# Altium PCB PCB2.PcbDoc
Units mil, origin at the board's own origin, x right, y up, seen from the top; angles counter-clockwise.
Board outline 6000 x 4000 mil, 2 copper layers (Top Layer, Bottom Layer); 29 components, 20 nets, 86 pads, 13 vias.
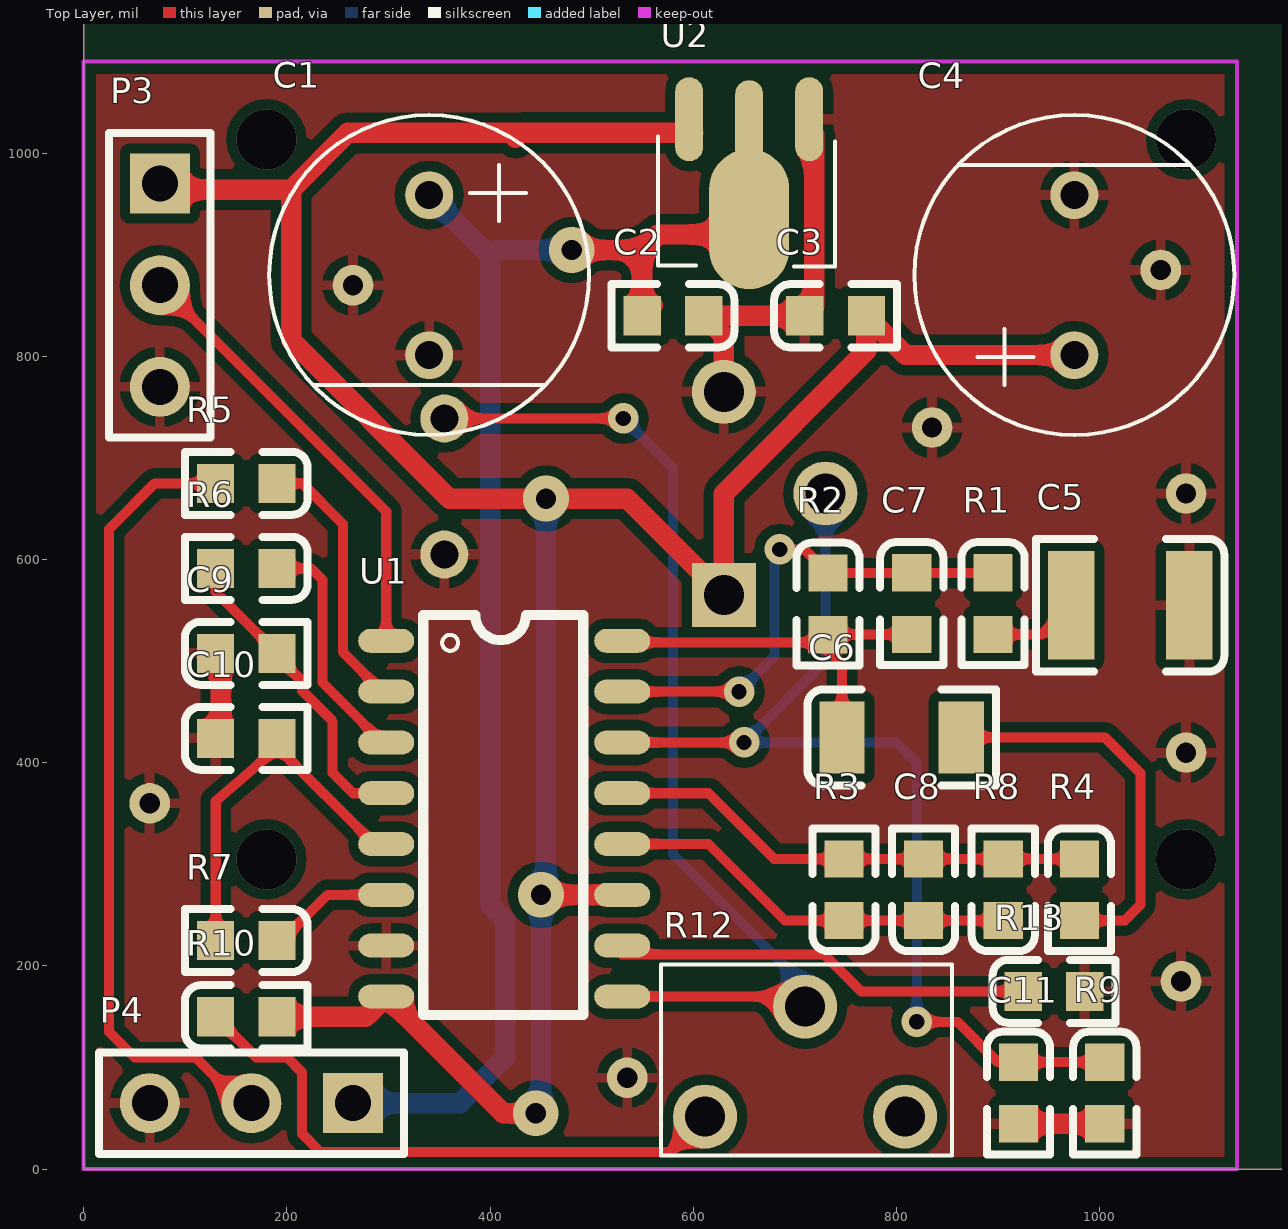
[diagram p0: Top Layer view]
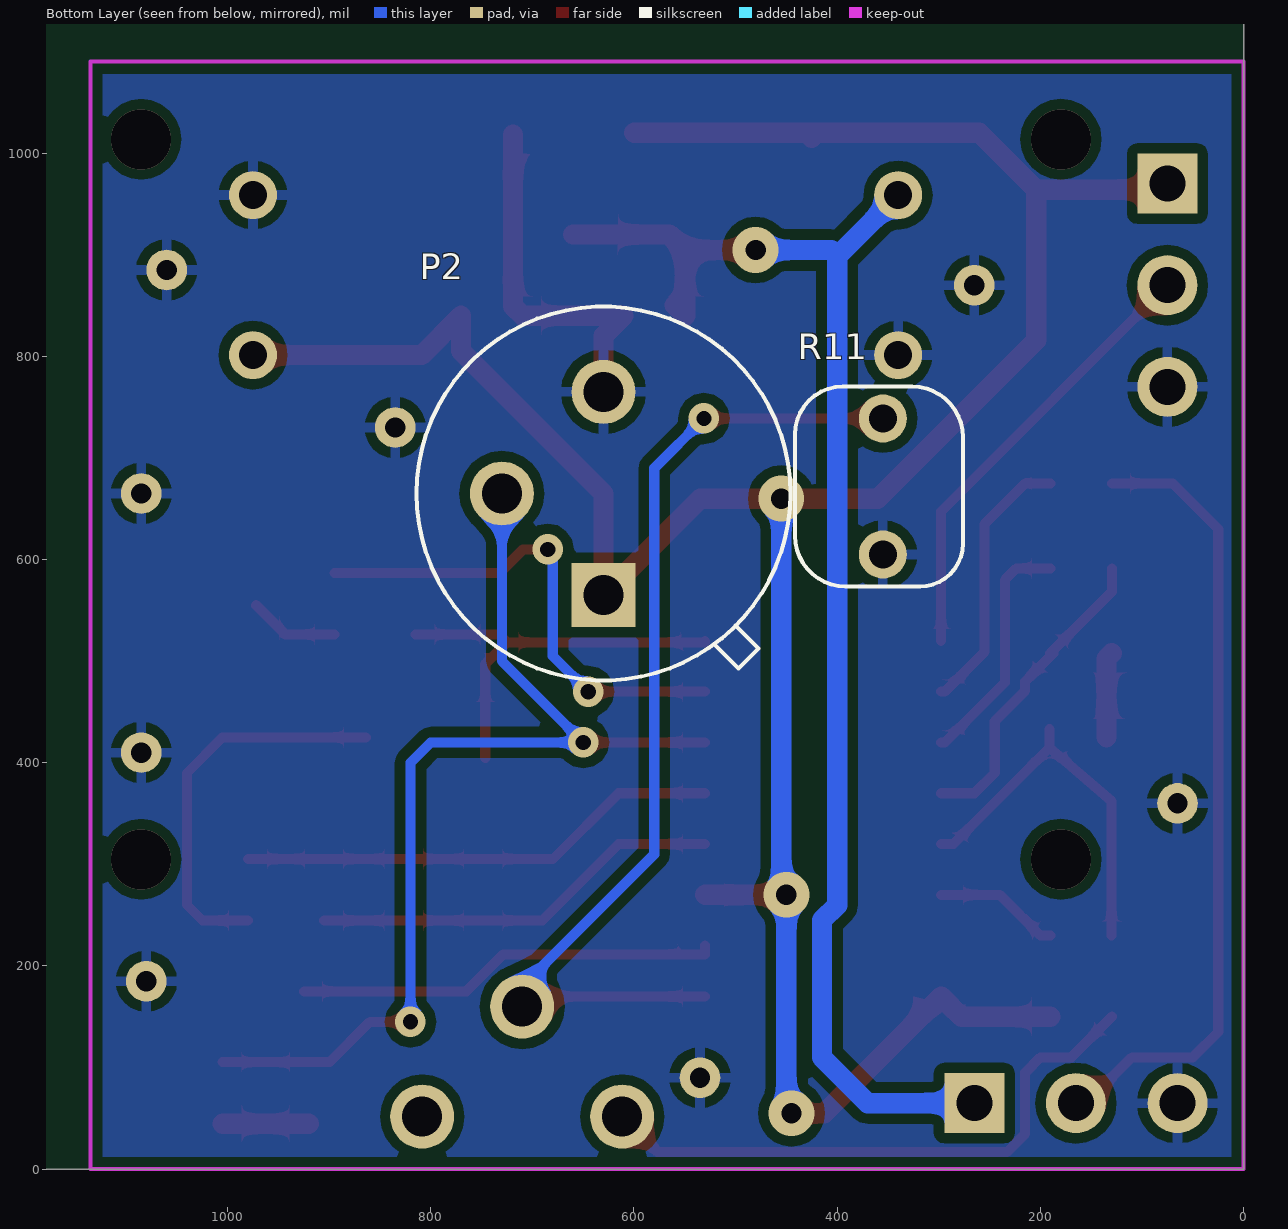
[diagram p1: Bottom Layer view, seen from below]
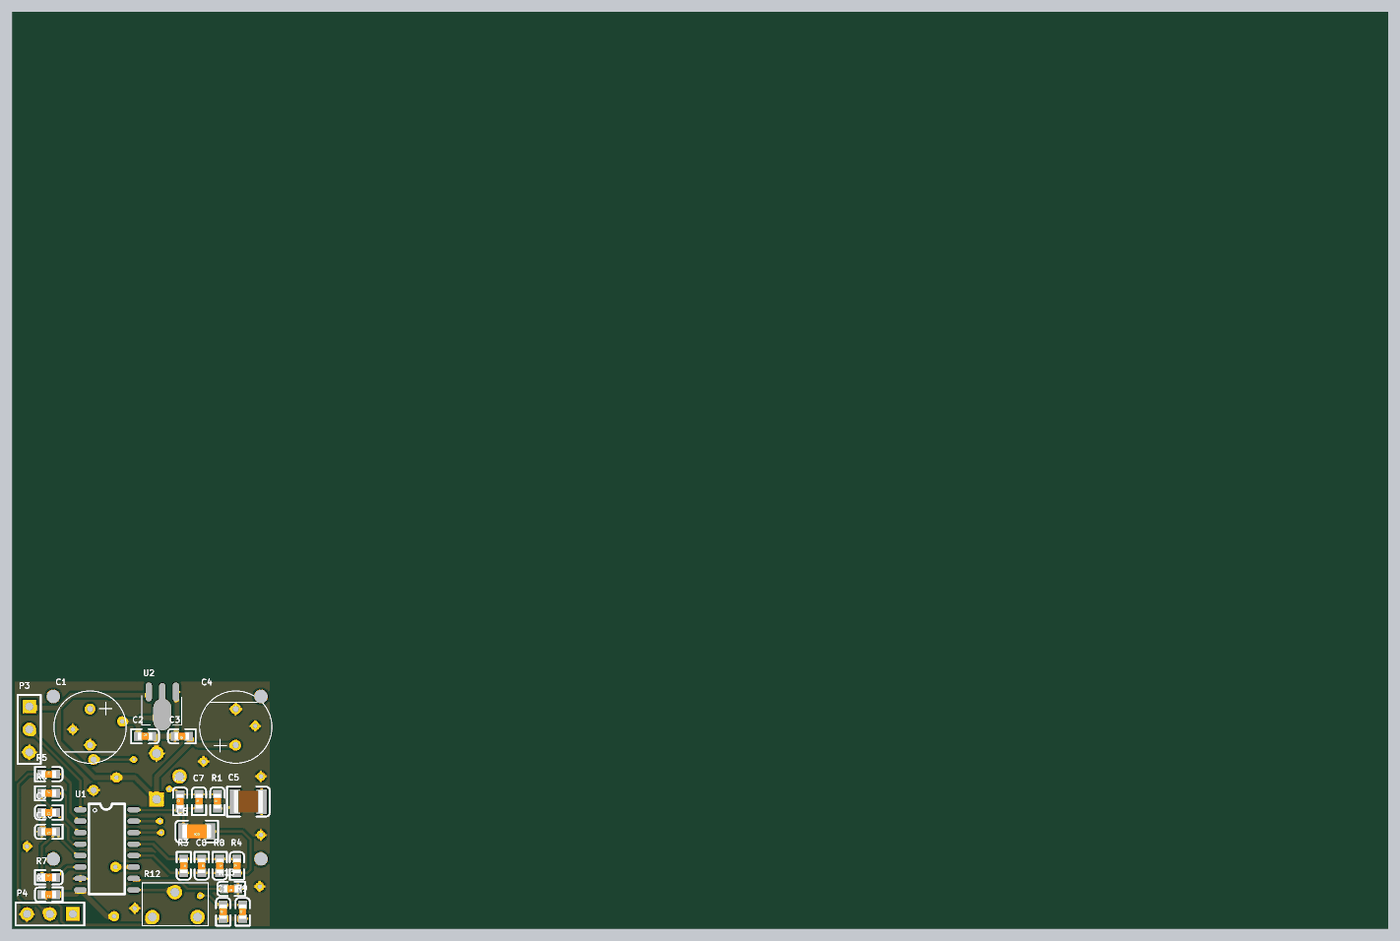
[diagram p2: 3D render of the assembled board from above, using the file's embedded part models]

## Layer stack, top to bottom
Top Solder: solder mask 0.4, Solder Resist, Dk 3.5
Top Layer: signal copper 1.4
Dielectric 1: dielectric 12.6, FR-4, Dk 4.8
Bottom Layer: signal copper 1.4
Bottom Solder: solder mask 0.4, Solder Resist, Dk 3.5

## Board outline
0,0 6000,0 6000,4000 0,4000

## Design rules (kind name [scope] priority, off if disabled: settings)
Clearance [All] p1: gap=10 ignorepadtopadclearanceinfootprint=FALSE except(0: Arc-Hole Track-Hole SMDPad-Hole THPad-Hole Via-Hole Fill-Hole Poly-Hole Region-Hole Text-Hole)
PolygonConnect [All] p1: connectstyle=Relief reliefconductorwidth=10 reliefentries=4 polygonreliefangle="90 Angle" airgapwidth=10
RoutingVias RoutingVias_1 [InNetClass('power')] p1: holewidth=20 width=45 viastyle="Through Hole" minholewidth=20 minwidth=45 maxholewidth=20 maxwidth=45
RoutingVias [All] p2: holewidth=15 width=30 viastyle="Through Hole" minholewidth=15 minwidth=30 maxholewidth=15 maxwidth=30
SolderMaskExpansion [All] p1: expansion=4
Width Width_1 [InNetClass('power')] p1: maxlimit=40 minlimit=20 preferedwidth=40
Width [All] p2: maxlimit=10 minlimit=10 preferedwidth=10
30 further rules are at their usual default settings.

## Classes and differential pairs
net class power: 3.3V 5V GND

## Components (designator, comment, footprint, x,y, rotation, side; value= is the part's Value field where it differs from the comment)
C1 "Cap" 8*12 340,880 r270 top value=220uF
C2 "Cap" 0603 580,840 r0 top value=0.1uF
C3 "Cap" 0603 740,840 r180 top value=0.1uF
C4 "Cap" 8*12 975,880 r90 top value=220uF
C5 "Cap Pol1" 1210 1030,555 r0 top value=47uF
C6 "Cap Pol1" 1206 805,425 r180 top value=10uF
C7 "Cap" 0603 815,556.65 r90 top value=0.01uF
C8 "Cap" 0603 826.67,275 r270 top value=0.01uF
C9 "Cap" 0603 160,507.67 r180 top value=0.1uF
C10 "Cap" 0603 160,424 r180 top value=0.1uF
C11 "Cap" 0603 920,75 r90 top value=0.01uF
P2 "RE200B" RE200B 630,665 r270 bottom locked
P3 "Header 3" HDR1X3 75,970 r270 top
P4 "Header 3" HDR1X3 265,65 r180 top
R1 "Res2" 0603 895,556.65 r90 top value=4.7K
R2 "Res2" 0603 732.5,556.34 r90 top value=2M
R3 "Res2" 0603 748.33,275 r270 top value=1M
R4 "Res2" 0603 980,275 r90 top value=10K
R5 "Res2" 0603 160,675 r0 top value=4.7K
R6 "Res2" 0603 160,591.33 r0 top value=200K
R7 "Res2" 0603 160,225 r0 top value=4.7M
R8 "Res2" 0603 905,275 r270 top value=10K
R9 "Res2" 0603 1005,75 r90 top value=47K
R10 "Res2" 0603 160,150 r180 top value=10k
R11 "Res2" photoresistor5539 355,671.93 r90 bottom value=1M
R12 "AdjustRes" RM063-503 611.57,51.73 r0 top
R13 "Res2" 0603 955,175 r180 top value=1M
U1 "BISS0001" BISS0001 334.13,151.89 r0 top locked
U2 "LDO" SOT-89-3 655,1030 r180 top

## Footprints (in the part's own frame and the unit in brackets; to place one, negate y for a bottom-side part, rotate by r counter-clockwise, add the part's x,y. Pads: shape width x height; smd on the part's side, far side on the other; paste and mask are expansions set on the pad)
8*12 [mm]
  round 1.2 hole 0.7: 1(-2,0) 2(2,0)
  silkscreen extent -4,-4 4,4
0603 [mm]
  rect 0.93x0.98 smd: 1(-0.77,0) 2(0.77,0)
  silkscreen extent -1.53,-0.79 1.54,0.79, body extent -0.8,-0.4 0.8,0.4, height 0.3
1206 [mm]
  rect 1.13x1.8 smd: 1(-1.49,0) 2(1.49,0)
  silkscreen extent -2.36,-1.2 2.35,1.2, body extent -1.6,-0.81 1.6,0.79, height 1
1210 [mm]
  rect 1.16x2.72 smd: 1(-1.475,0) 2(1.475,0)
  silkscreen extent -2.36,-1.66 2.35,1.66, body extent -1.6,-1.25 1.6,1.25, height 1.3
BISS0001 [mm]
  oval 1.4x0.6 smd: 1(-0.925,9.35) 2(-0.925,8.08) 3(-0.925,6.81) 4(-0.925,5.54) 5(-0.925,4.27) 6(-0.925,3) 7(-0.925,1.73) 8(-0.925,0.46) 9(4.975,0.46) 10(4.975,1.73) 11(4.975,3) 12(4.975,4.27) 13(4.975,5.54) 14(4.975,6.81) 15(4.975,8.08) 16(4.975,9.35)
  silkscreen extent 0,0 4,10
HDR1X3 [mm] "Connector; Header; 3 Position"
  rect 1.5x1.5 hole 0.9: 1(0,0)
  round 1.5 hole 0.9: 2(2.54,0) 3(5.08,0)
  silkscreen extent -1.27,-1.27 6.35,1.27
photoresistor5539 [mm]
  round 1.2 hole 0.7: 1(-1.7,0) 2(1.7,0)
  silkscreen extent -2.5,-2 2.5,2.2
RE200B [mm]
  rect 1.6x1.6 hole 1: 1(2.54,0)
  round 1.6 hole 1: 2(0,-2.54) 3(-2.54,0)
  silkscreen extent -4.67,-4.67 4.67,4.67
RM063-503 [mm]
  round 1.6 hole 1: 1(0,0) 2(2.5,2.75) 3(5,0)
  silkscreen extent -1.1,-0.97 6.17,3.8
SOT-89-3 [mm]
  oval 0.7x2.1 smd: 1(-1.501,-0.086) 2(0,-0.013) 3(1.501,-0.086)
  oval 2x3.5 smd: 2(0,2.413)
  silkscreen extent -2.15,0.35 2.27,3.6

## Part data
C1 C2 C3 C4 C7 C8 C9 C10 C11: "Capacitor", LatestRevisionDate=17-Jul-2002, LatestRevisionNote="Re-released for DXP Platform.", PackageDescription="Radial Cap, Thru-Hole; 2 Leads; 0.3 in Pin Spacing", PackageReference=RAD-0.3, Published=8-Jun-2000, Publisher="Altium Limited"
C5 C6: "Polarized Capacitor (Radial)", LatestRevisionDate=17-Jul-2002, LatestRevisionNote="Re-released for DXP Platform.", PackageDescription="Polarized Capacitor (Radial); 2 Leads", PackageReference=RB7.6-15, Published=8-Jun-2000, Publisher="Altium Limited"
P2 U1: "Infrared Sensor"
P3 P4: "Header, 3-Pin", LatestRevisionDate=17-Jul-2002, LatestRevisionNote="Re-released for DXP Platform.", Publisher="Altium Limited"
R1 R2 R3 R4 R5 R6 R7 R8 R9 R10 R11 R13: "Resistor", LatestRevisionDate=17-Jul-2002, LatestRevisionNote="Re-released for DXP Platform.", PackageDescription="Axial Device, Thru-Hole; 2 Leads; 0.4 in Pin Spacing", PackageReference=AXIAL-0.4, Published=8-Jun-2000, Publisher="Altium Limited"
R12: library part RM063-503, "RM063-503", =50k
U2: library part SE8550, "+1V~35V >5V"

## Free pads (board coordinates)
  round 40 hole 20: 2(535,90) 3(65,360) 4(835,730) 5(265,870) 6(1060,885) 7(1085,665) 8(1085,410) 9(1080,185)

## Via types
v1: diameter 30, hole 15, Top Layer to Bottom Layer, 5 vias
v2: diameter 45, hole 20, Top Layer to Bottom Layer, 4 vias
v3: diameter 59.06, hole 59.06, Top Layer to Bottom Layer, 4 vias

## Nets (pads, with @x,y where several pads share a name; then routed paths per layer and width w, separated by ;. In a path a pad name is that pad's centre, name@x,y a point inside that pad or via, vN(x,y) a via of type N, cw(c..) or ccw(c..) an arc to the next point about the centre after c; other vN are vias at no path point)
1IN-: C7.2 R1.2 R2.2 U1.15 | length 490.9
  Top Layer w10: U1.15 v1(645,470) ; v1(685,610) 709.15,610 R2.2 R1.2@894.69,586.65
  Bottom Layer w10: v1(645,470) 680,505 680,605 v1(685,610)
1OUT: C6.2 C7.1 R2.1 U1.16 | length 412.1
  Top Layer w10: U1.16 530,518.5 R2.1@724.98,518.5 ; C6.2@746.34,405 746.34,497.15 R2.1@724.98,518.5 ; C7.1 732.81,526.34 R2.1 R2.1@724.98,518.5
2IN-: C8.1 R3.1 R4.2 R8.1 U1.13 | length 476.8
  Top Layer w10: U1.13 615,370 679.68,305.32 R3.1 R4.2
2OUT: C8.2 R3.2 R8.2 U1.12 | length 406.2
  Top Layer w10: U1.12 615,320 690.31,244.69 R3.2 C8.2 R8.2
3.3V: C1.1 C2.1 P4.1 U2.2 | length 1388.1
  Top Layer w20: v2(480.31,904.69) 549.69,904.69 ; C2.1@560,850.31 C2.1 549.69,904.69 ; U2.2@660,920 565,920 549.69,904.69
  Bottom Layer w20: P4.1 370,65 415,110 415,244.9 400,259.9 400,898.74 C1.1 ; 405.94,904.69 v2(480.31,904.69)
5V: C3.1 C4.1 P2.1 P3.1 R10.1 U1.8 U1.11 U2.3 | length 2792.7
  Top Layer w20: P3.1 75,964.13 204.13,964.13 ; R10.1 277.72,150 U1.8 412.72,55 v2(445,55) ; 425,1015 430,1020 ; v2(450,270) U1.11 ; U2.3@600,1020 430,1020 ; C4.1 809.05,801.26 C3.1 770.31,805.31 630,665 P2.1 535,660 v2(455,660) 360,660 204.13,815.87 204.13,964.13 ; 204.13,964.13 260,1020 430,1020
  Bottom Layer w20: v2(445,55) 450,60 v2(450,270) 455,275 v2(455,660)
GND: C1.2 C2.2 C3.2 C4.2 C5.2 C9.2 C10.2 C11.1 P2.3 P3.3 P4.3 pad.2 pad.3 pad.4 pad.5 pad.6 pad.7 pad.8 pad.9 R9.1 R11.1 R13.1 U1.7 U2.1 | length 534.7
  Top Layer w20: C9.2 135,502.35 C10.2@135,425 ; P2.3 630,820.32 C2.2 C3.2 719.09,849.41 U2.1@719.09,1018.39 ; C11.1 R9.1
NetC5_1: C5.1 R1.1 | length 88.8
  Top Layer w10: R1.1 943.27,526.34 C5.1
NetC6_1: C6.1 R4.1 | length 387.2
  Top Layer w10: C6.1 1005,425 1040,390 1040,260 1024.69,244.69 R4.1
NetC9_1: C9.1 R6.1 U1.4 | length 311.3
  Top Layer w10: R6.1 129.69,568.3 C9.1 ; C9.1@187.33,507.67 215,480 215,470.77 245,440.77 245,390 265,370 U1.4
NetC10_1: C10.1 R7.1 U1.5 | length 376.9
  Top Layer w10: R7.1@130,230 130,362.22 C10.1@191.06,414.75 ; C10.1@191.06,433 C10.1@191.06,414.75 ; U1.5 285.81,320 C10.1@191.06,414.75
NetC11_2: C11.2 P2.2 R9.2 U1.14 | length 1032.9
  Top Layer w10: U1.14 v1(650,420) ; v1(820,145) 860,145 899.68,105.32 C11.2 R9.2
  Bottom Layer w10: P2.2 730,500 v1(650,420) 800,420 820,400 v1(820,145)
NetP3_2: P3.2 U1.1 | length 442.3
  Top Layer w10: P3.2 297.72,647.28 U1.1
NetR5_2: R5.2 U1.2 | length 266.1
  Top Layer w10: R5.2 215,675 255.16,634.84 255.16,508.89 294.05,470 U1.2
NetR6_2: R6.2 U1.3 | length 237.5
  Top Layer w10: R6.2 223.67,591.33 235,580 235,479.05 294.05,420 U1.3
NetR7_2: R7.2 U1.6 | length 124
  Top Layer w10: R7.2@190.32,230 200,230 240,270 U1.6
NetR10_2: R10.2 R12.1 | length 586.7
  Top Layer w10: R10.2 169.69,110 200,110 215,95 215,34.73 232.76,16.97 576.81,16.97 R12.1
NetR11_2: R11.2 R12.2 U1.9 | length 999.1
  Top Layer w10: R11.2 v1(531.14,738.86) ; U1.9 R12.2@700,170
  Bottom Layer w10: v1(531.14,738.86) 580,690 580,310 710,180 R12.2
NetR13_2: R13.2 U1.10 | length 418.4
  Top Layer w10: U1.10 530,211.38 728.62,211.38 765,175 R13.2
SIGNAL: P4.2 R5.1 | length 787.3
  Top Layer w10: R5.1 70,675 25,630 25,135 50,110 110,110 155,65 P4.2
pads on no net: R12.3
copper on no net:
  other v3: 179.8,305 1085,305 179.8,1013.66 1085,1013.66

## Polygon pours and split planes (outlines as drawn)
GND on Top Layer "Keep-Out Layer-No Net" (solid, remove dead copper, pour order 8): -145,1200 -95,1150 1335,1150 1335,-65 1255,-145 1245,-135 10,-135
GND on Bottom Layer "Keep-Out Layer-No Net" (solid, remove dead copper, pour order 10): -75,1185 -30,1140 1240,1140 1240,-145 1245,-150 -155,-150

## Keep-outs
Keep-Out Layer:
  lines w3.94: 0,0 0,1090 1135,1090 1135,0 0,0